# EAGLE board STorM32 BGC v130 (EAGLE 6.5.0)
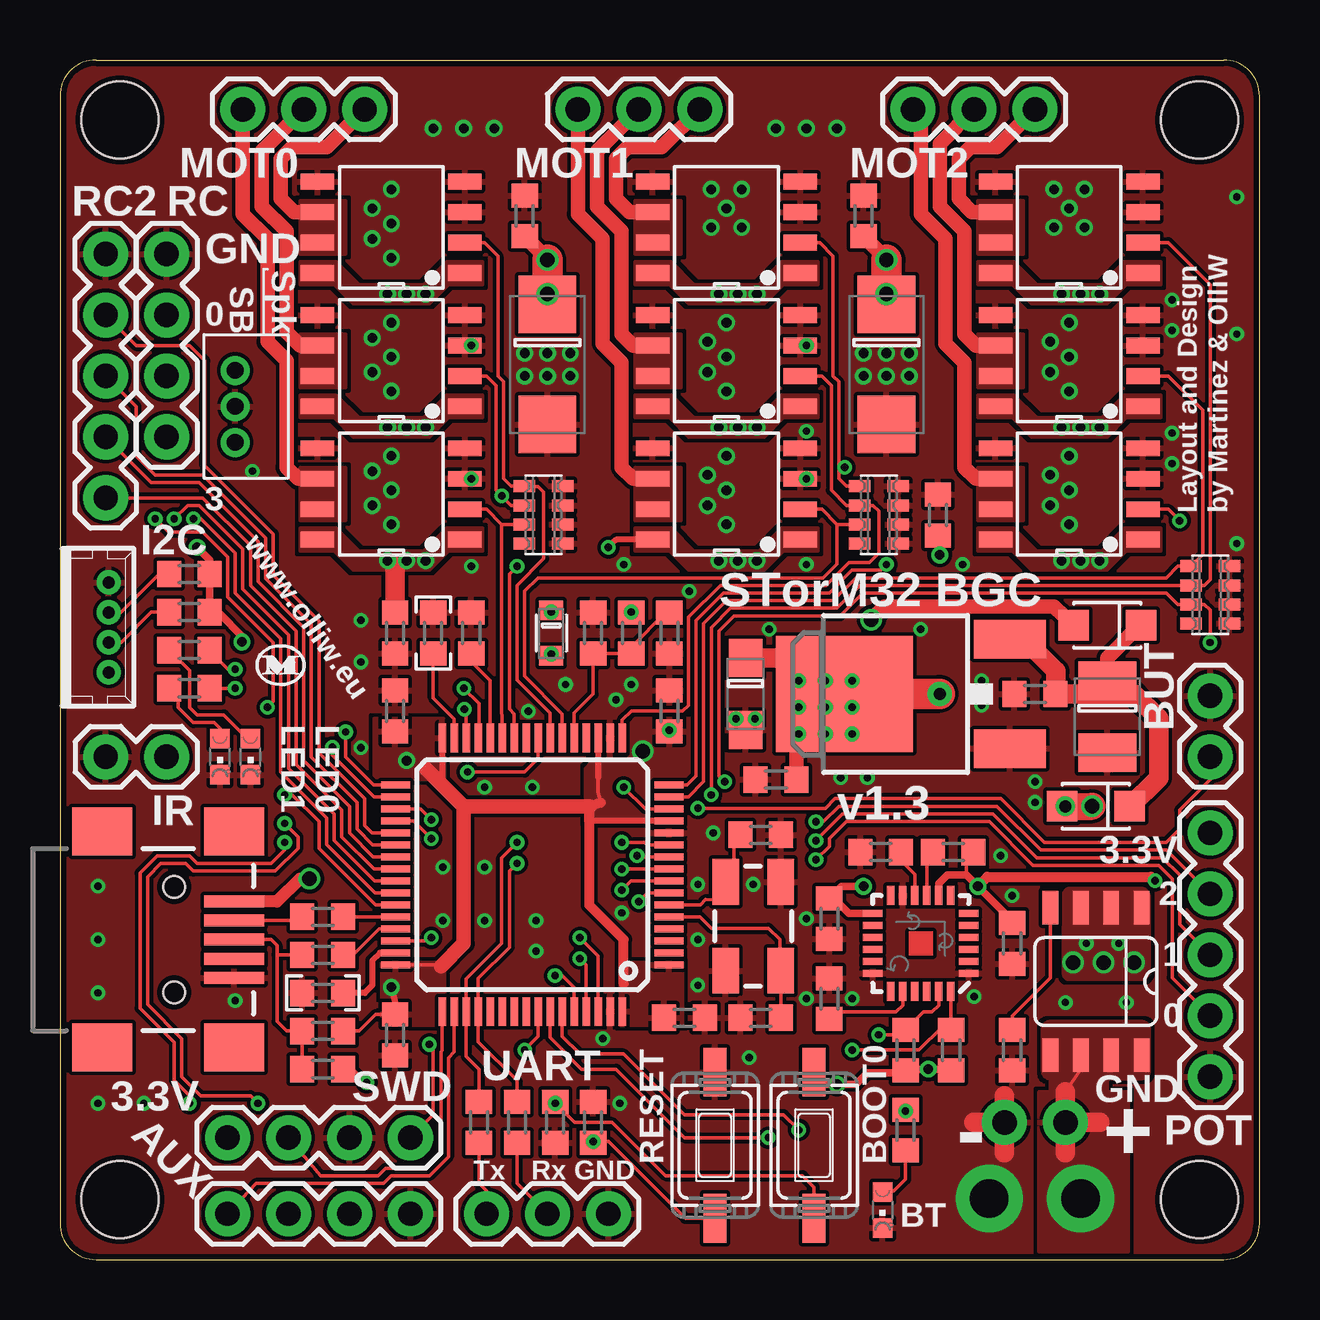
[diagram p0: board, top side]
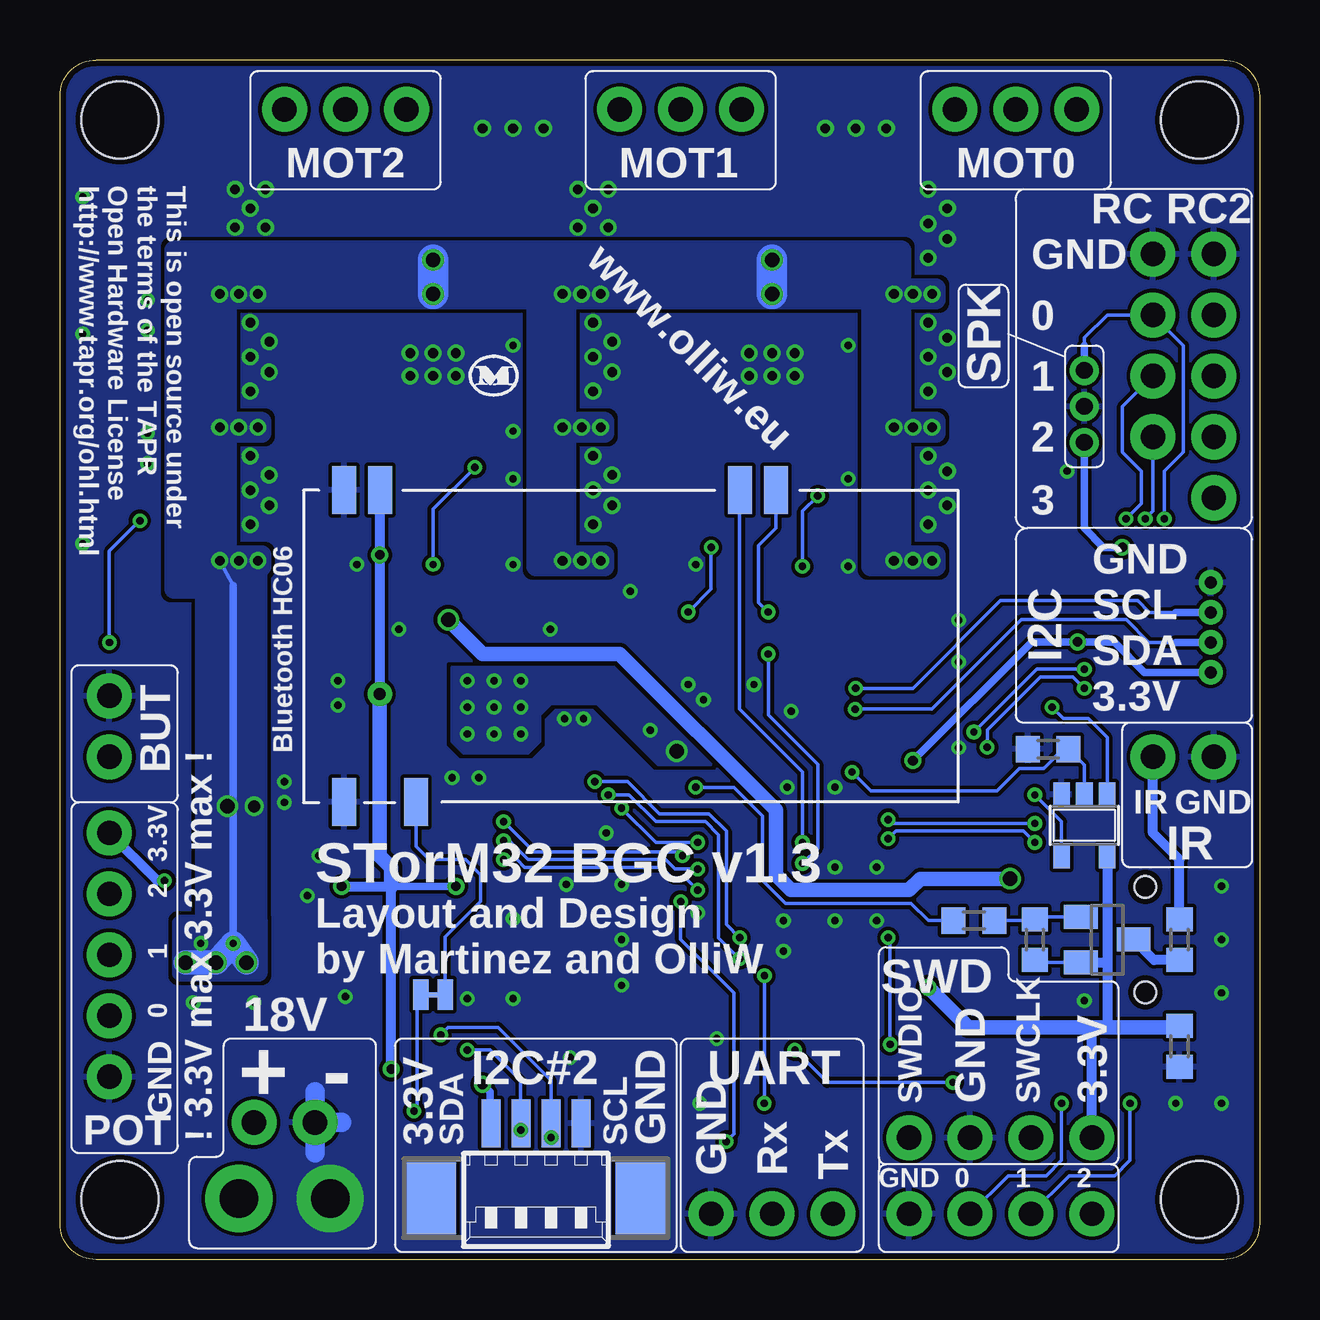
[diagram p1: board, bottom side, seen from below]

Size 50 x 50 mm. Coordinates in mm from the lower left corner, seen from the top.
Outline: 1.5,50 48.5,50 arc-90 50,48.5 50,1.5 arc-90 48.5,0 1.5,0 arc-90 0,1.5 0,48.5 arc-90 1.5,50
Copper layers (1*16): Top 0.035mm / dielectric 1.5mm / Bottom 0.035mm
Design rules "Fusion_eagle_rule_v1.1-shapes-supply-changed": minimum track width 6mil, minimum drill 12mil, track to track 6mil, track to pad 6mil, pad to pad 6mil, via to via 6mil, smd to smd 0mil, copper to edge 10mil, drill to drill 10mil, minimum pad ring 10mil, minimum via ring 6mil, stop-mask expansion 2mil, vias tented up to drill 100mil, thermal gap 6mil
Holes 3.2 mm at 2.5,2.5 2.5,47.5 47.5,2.5 47.5,47.5

## Footprints (pad centres in the part's own frame; a part is rotated, then mirrored left to right if it is on the bottom)
1X1_WITHOUT = drill 1.016 pad 1.88: 1 0,0
SMC_B = smd 1.6 x 2.4: + -1.5,0; - 1.5,0
C0603 = smd 1 x 1.1: 1 -0.85,0; 2 0.85,0
SMC_A = smd 1.6 x 1.4: + -1.5,0; - 1.5,0
SMC_C = smd 2.4 x 2.4: + -2.5,0; - 2.5,0
SOD123W-DIODE = smd 1.27 x 1.27: A -1.4,0; C 1.4,0
SOD110-R = smd 0.8 x 1: A 0.95,0; C -0.95,0
TQFP64 = smd 1.2 x 0.3: 1 -5.7,3.75; 2 -5.7,3.25; 3 -5.7,2.75; 4 -5.7,2.25; 5 -5.7,1.75; 6 -5.7,1.25; 7 -5.7,0.75; 8 -5.7,0.25; 9 -5.7,-0.25; 10 -5.7,-0.75; 11 -5.7,-1.25; 12 -5.7,-1.75; 13 -5.7,-2.25; 14 -5.7,-2.75; 15 -5.7,-3.25; 16 -5.7,-3.75; 33 5.7,-3.75; 34 5.7,-3.25; 35 5.7,-2.75; 36 5.7,-2.25; 37 5.7,-1.75; 38 5.7,-1.25; 39 5.7,-0.75; 40 5.7,-0.25; 41 5.7,0.25; 42 5.7,0.75; 43 5.7,1.25; 44 5.7,1.75; 45 5.7,2.25; 46 5.7,2.75; 47 5.7,3.25; 48 5.7,3.75 | smd 0.3 x 1.2: 17 -3.75,-5.7; 18 -3.25,-5.7; 19 -2.75,-5.7; 20 -2.25,-5.7; 21 -1.75,-5.7; 22 -1.25,-5.7; 23 -0.75,-5.7; 24 -0.25,-5.7; 25 0.25,-5.7; 26 0.75,-5.7; 27 1.25,-5.7; 28 1.75,-5.7; 29 2.25,-5.7; 30 2.75,-5.7; 31 3.25,-5.7; 32 3.75,-5.7; 49 3.75,5.7; 50 3.25,5.7; 51 2.75,5.7; 52 2.25,5.7; 53 1.75,5.7; 54 1.25,5.7; 55 0.75,5.7; 56 0.25,5.7; 57 -0.25,5.7; 58 -0.75,5.7; 59 -1.25,5.7; 60 -1.75,5.7; 61 -2.25,5.7; 62 -2.75,5.7; 63 -3.25,5.7; 64 -3.75,5.7
DPAK = smd 1.6 x 3: 1 -2.28,-5.31; 3 2.28,-5.31 | smd 4.826 x 5.715: 4 0,1.588
DFN8 = smd 0.66 x 1.397: 1 0,-3.073; 2 1.27,-3.073; 3 2.54,-3.073; 4 3.81,-3.073; 5 3.81,3.073; 6 2.54,3.073; 7 1.27,3.073; 8 0,3.073
SOT23-5 = smd 0.69 x 0.99: 1 -0.95,-1.29; 2 0,-1.29; 3 0.95,-1.29; 4 0.95,1.3; 5 -0.95,1.3
QFN-24 = smd 0.8 x 0.3: 1 -2,1.25; 2 -2,0.75; 3 -2,0.25; 4 -2,-0.25; 5 -2,-0.75; 6 -2,-1.25; 13 2,-1.25; 14 2,-0.75; 15 2,-0.25; 16 2,0.25; 17 2,0.75; 18 2,1.25 | smd 0.3 x 0.8: 7 -1.25,-2; 8 -0.75,-2; 9 -0.25,-2; 10 0.25,-2; 11 0.75,-2; 12 1.25,-2; 19 1.25,2; 20 0.75,2; 21 0.25,2; 22 -0.25,2; 23 -0.75,2; 24 -1.25,2
BT_HC05_BASIC = smd 2 x 1: 1 0,0; 2 0,-1.5; 12 0,-16.5; 13 0,-18; 22 13,-18; 24 13,-15
USB-MINIB = smd 2.5 x 0.5: D+ 2.5,0; D- 2.5,0.8; GND 2.5,-1.6; ID 2.5,-0.8; VBUS 2.5,1.6 | smd 2.5 x 2: MTN1 -3,4.5; MTN2 2.5,4.5; MTN3 -3,-4.5; MTN4 2.5,-4.5 | hole 0.9: 0,2.2; 0,-2.2
53047-04SMALL = drill 0.5 pad 0.698: 1 1.875,0.45; 2 0.625,0.45; 3 -0.625,0.45; 4 -1.875,0.45
B3B-ZR = drill 0.7 pad 1.1: 1 -1.5,0; 2 0,0; 3 1.5,0
MOLEX-53261-04-SMD-FLAT = smd 0.8 x 2: 1 1.875,-2.5; 2 0.625,-2.5; 3 -0.625,-2.5; 4 -1.875,-2.5 | smd 2.1 x 3: S1 4.375,0.625; S2 -4.375,0.625
1X04 = drill 1.016 pad 1.88: 1 0,0; 2 2.54,0; 3 5.08,0; 4 7.62,0
1X03 = drill 1.016 pad 1.88: 1 0,0; 2 2.54,0; 3 5.08,0
1X05 = drill 1.016 pad 1.88: 1 0,0; 2 2.54,0; 3 5.08,0; 4 7.62,0; 5 10.16,0
1X02 = drill 1.016 pad 1.88: 1 0,0; 2 2.54,0
CHIPLED_0603 = smd 0.8 x 0.8: A 0,-0.75; C 0,0.75
CRYTSAL-SMD-5X3 = smd 1.9 x 1.1: 1 -1.85,-1.15; 2 1.85,-1.15; 3 1.85,1.15; 4 -1.85,1.15
R0603 = smd 1 x 1.1: 1 -0.85,0; 2 0.85,0
CTS742C083 = smd 0.5 x 0.9: 1 -1.2,-0.8; 2 -0.4,-0.8; 3 0.4,-0.8; 4 1.2,-0.8; 5 1.2,0.8; 6 0.4,0.8; 7 -0.4,0.8; 8 -1.2,0.8
SJ_2S-TRACE = smd 0.635 x 1.27: 1 -0.508,0; 2 0.508,0 | smd 1.016 x 0.203: P$1 0,0
SW_TACT_3X6 = smd 2.032 x 0.965: 1 -3.048,0; 2 3.048,0
SO08 = smd 0.66 x 1.397: 1 0,-3.073; 2 1.27,-3.073; 3 2.54,-3.073; 4 3.81,-3.073; 5 3.81,3.073; 6 2.54,3.073; 7 1.27,3.073; 8 0,3.073
SOT23 = smd 1 x 1.4: 1 -0.95,-1.1; 2 0.95,-1.1; 3 0,1.1

## Placement (x,y rotation side)
BAT+  [1X1_WITHOUT]  41.91,5.71 90 top
BAT-  [1X1_WITHOUT]  39.37,5.71 0 top
C1  10u/20V  [SMC_B]  43.66,22.62 270 top
C2  100n  [C0603]  40.64,23.57 180 top
C3  100n  [C0603]  29.84,20 180 top
C4  10u/6.3V  [SMC_A]  28.57,23.57 270 top
C5  100n  [C0603]  13.97,9.37 270 top
C6  100n  [C0603]  26.04,10.08 0 top
C7  100n  [C0603]  13.97,22.86 90 top
C8  100n  [C0603]  25.4,22.86 90 top
C9  22p  [C0603]  29.21,10.08 0 top
C10  22p  [C0603]  29.21,17.7 180 top
C11  100n  [C0603]  22.23,5.71 90 top
C12  100n  [C0603]  25.4,26.11 270 top
C13  33u/20V  [SMC_C]  34.45,37.31 270 top
C14  33u/20V  [SMC_C]  20.32,37.31 270 top
C15  100n  [C0603]  33.5,43.5 90 top
C16  100n  [C0603]  19.37,43.5 90 top
C17  100n  [C0603]  13.97,26.11 270 top
C18  100n  [C0603]  3.33,8.89 270 bottom
C19  100n  [C0603]  32.07,14.21 270 top
C20  10n  [C0603]  39.69,13.18 270 top
C21  2.2n  [C0603]  32.07,10.87 90 top
C22  100n  [C0603]  34.21,16.99 180 top
C23  100n  [C0603]  36.59,31.04 90 top
D1  PMEG3010ER  [SOD123W-DIODE]  43.18,18.89 0 top
D2  PMEG3010ER  [SOD123W-DIODE]  43.66,26.43 0 top
D3  1PS76SB40  [SOD110-R]  20.48,26.11 270 top
IC1  STM32F103RCT6  [TQFP64]  19.68,16.03 180 top
IC2  NCP1117DT33G  [DPAK]  34.29,23.57 90 top
IC3  TC4452DFN08  [DFN8]  13.81,30 90 top
IC4  TC4452DFN08  [DFN8]  13.81,35.56 90 top
IC5  TC4452DFN08  [DFN8]  13.81,41.12 90 top
IC6  TC4452DFN08  [DFN8]  27.78,30 90 top
IC7  TC4452DFN08  [DFN8]  27.78,35.56 90 top
IC8  TC4452DFN08  [DFN8]  27.78,41.12 90 top
IC9  TC4452DFN08  [DFN8]  42.07,30 90 top
IC10  TC4452DFN08  [DFN8]  42.07,35.56 90 top
IC11  TC4452DFN08  [DFN8]  42.07,41.12 90 top
IC12  74AHC1G86DBV  [SOT23-5]  7.3,18.1 180 bottom
IC13  MPU6050  [QFN-24]  35.88,13.18 180 top
IC14  BT HC06  [BT_HC05_BASIC]  20.16,32.07 270 bottom
JP1  USBMINIBSMD  [USB-MINIB]  4.76,13.34 0 top
JP2  MPU-I2C#1  [53047-04SMALL]  1.59,26.35 270 top
JP3  SPK  [B3B-ZR]  7.3,35.56 90 top
JP4  I2C#2  [MOLEX-53261-04-SMD-FLAT]  30.16,3.17 180 bottom
JP5  SWD  [1X04]  14.61,5.08 180 top
JP6  UART  [1X03]  22.86,1.91 180 top
JP7  RC  [1X04]  4.45,41.91 270 top
JP8  POT  [1X05]  47.94,7.62 90 top
JP9  RC2  [1X05]  1.91,41.91 270 top
JP10  BUT  [1X02]  47.94,23.5 270 top
JP11  AUX  [1X04]  14.61,1.91 180 top
JP12  MOT0  [1X03]  7.62,47.94 0 top
JP13  MOT1  [1X03]  21.59,47.94 0 top
JP14  MOT2  [1X03]  35.56,47.94 0 top
JP15  IR  [1X02]  1.91,20.95 0 top
LED1  green  [CHIPLED_0603]  7.94,20.95 180 top
LED2  red  [CHIPLED_0603]  6.67,20.95 180 top
LED3  yellow  [CHIPLED_0603]  34.29,2.06 180 top
Q1  7B-8.000MAAJ-T  [CRYTSAL-SMD-5X3]  28.89,13.89 270 top
R1  47k  [R0603]  39.69,8.73 270 top
R2  10k  [R0603]  20.64,5.71 270 top
R3  10k  [R0603]  17.14,26.11 270 top
R4  0  [R0603]  15.56,26.11 270 top
R5  0  [R0603]  10.95,11.11 0 top
R6  1k  [R0603]  5.4,25.4 180 top
R7  2.2k  [R0603]  5.4,23.81 180 top
R8  22  [R0603]  10.95,14.29 0 top
R9  22  [R0603]  10.95,12.7 0 top
R10  150  [R0603]  10.95,7.94 0 top
R11  1.5k  [R0603]  10.95,9.53 180 top
R12  1k  [R0603]  17.46,5.71 270 top
R13  1k  [R0603]  19.05,5.71 270 top
R14  2.2k  [R0603]  5.4,28.57 0 top
R15  2.2k  [R0603]  5.4,26.99 0 top
R16  10k  [R0603]  8.81,21.27 0 bottom
R17  10k  [R0603]  23.81,26.11 270 top
R18  1.5k  [R0603]  22.23,26.11 270 top
R19  2.2k  [R0603]  11.91,14.13 0 bottom
R20  10k  [R0603]  9.37,13.34 270 bottom
R21  47  [R0603]  3.33,13.34 90 bottom
R22  10k  [R0603]  37.23,16.99 0 top
R23  2.2k  [R0603]  35.24,8.73 270 top
R24  2.2k  [R0603]  37.15,8.73 270 top
R25  2.2k  [R0603]  35.24,5.4 270 top
RN1  10k  [CTS742C083]  20.16,31.04 270 top
RN2  10k  [CTS742C083]  34.13,31.04 270 top
RN3  10k  [CTS742C083]  47.94,27.7 270 top
SJ1  [SJ_2S-TRACE]  34.45,11.03 180 bottom
SW1  [SW_TACT_3X6]  27.3,4.76 90 top
SW2  [SW_TACT_3X6]  31.43,4.76 270 top
T1  SI4835DDY  [SO08]  45.09,11.59 180 top
T2  BCX71HSMD  [SOT23]  6.35,13.34 270 bottom

## Library data of the parts
BAT+ BAT- D1 D2 IC3-IC11 JP4 Q1 T1 = # stdlib
C1-C23 R1-R25 = rcl
D3 = diode
IC1 = # stm32
IC2 IC13 JP5-JP11 JP15 SJ1 = # SparkFun2
IC12 = 74xx-little-de
IC14 = # SerialPortBluetooth
JP1 = SparkFun
JP2 = con-molex
JP3 = # jst
JP12-JP14 = # SparkFun
LED1-LED3 = led
RN1-RN3 = resistor-net; OC_FARNELL: unknown; OC_NEWARK: unknown
SW1 SW2 = # dp_devices
T2 = transistor-pnp

## Nets
3.3V: C3.1 C4.+ C5.1 C6.1 C7.1 C8.1 C18.1 C19.1 C20.1 C23.1 IC1.1 IC1.13 IC1.19 IC1.32 IC1.48 IC1.64 IC2.4 IC12.5 IC13.8 IC13.13 IC14.12 JP2.1 JP3.1 JP4.1 JP5.4 JP8.5 R11.1 R14.2 R15.2 R20.2 R22.2 R23.2 R24.2 SW2.1 T2.2
A0: IC1.27 IC3.2 RN1.3
A1: IC1.22 IC6.2 RN2.3
A2: IC1.62 IC9.2 RN3.3
AUX0: IC1.35 JP11.2
AUX1: IC1.36 JP11.3
AUX2: IC1.50 JP11.4
B0: IC1.26 IC4.2 RN1.2
B1: IC1.17 IC7.2 RN2.2
B2: IC1.15 IC10.2 RN3.1
BATP: BAT+.1 T1.5 T1.6 T1.7 T1.8
BOOT1: IC1.28 R3.2
BUT: IC1.11 JP10.2
C0: IC1.23 IC5.2 RN1.1
C1: IC1.16 IC8.2 RN2.1
C2: IC1.61 IC11.2 RN3.2
GND: BAT-.1 C1.- C2.2 C3.2 C4.- C5.2 C6.2 C7.2 C8.2 C9.1 C10.1 C11.2 C12.2 C13.- C14.- C15.2 C16.2 C17.2 C18.2 C19.2 C20.2 C21.2 C22.2 C23.2 IC1.12 IC1.18 IC1.63 IC2.1 IC3.3 IC3.4 IC3.5 IC4.3 IC4.4 IC4.5 IC5.3 IC5.4 IC5.5 IC6.3 IC6.4 IC6.5 IC7.3 IC7.4 IC7.5 IC8.3 IC8.4 IC8.5 IC9.3 IC9.4 IC9.5 IC10.3 IC10.4 IC10.5 IC11.3 IC11.4 IC11.5 IC12.3 IC13.1 IC13.11 IC13.18 IC14.13 IC14.22 JP1.GND JP2.4 JP3.2 JP4.4 JP5.2 JP6.1 JP7.1 JP8.1 JP9.1 JP10.1 JP11.1 JP15.1 LED1.C LED2.C LED3.C Q1.2 Q1.4 R1.2 R2.2 R3.1 R4.1 R5.1 R16.1 R18.1 RN1.5 RN1.6 RN1.7 RN1.8 RN2.5 RN2.6 RN2.7 RN2.8 RN3.5 RN3.6 RN3.7 RN3.8 SW1.2
IR: IC1.14 R19.1
LED0: IC1.33 R6.1
LED1: IC1.34 R7.1
LIPO: C12.1 IC1.21 R17.2 R18.2
M0A: IC3.6 IC3.7 JP12.1
M0B: IC4.6 IC4.7 JP12.2
M0C: IC5.6 IC5.7 JP12.3
M1A: IC6.6 IC6.7 JP13.1
M1B: IC7.6 IC7.7 JP13.2
M1C: IC8.6 IC8.7 JP13.3
M2A: IC9.6 IC9.7 JP14.1
M2B: IC10.6 IC10.7 JP14.2
M2C: IC11.6 IC11.7 JP14.3
N$1: R21.1 T2.3
N$2: JP15.2 R21.2
N$3: R25.1 SJ1.2
N$4: IC14.24 SJ1.1
N$5: C11.1 IC1.7 SW1.1
N$6: IC1.60 R2.1 SW2.2
N$8: LED1.A R6.2
N$9: LED2.A R7.2
N$10: IC1.47 R5.2
N$11: C9.2 IC1.5 Q1.3
N$12: C10.2 IC1.6 Q1.1
N$15: JP1.D- R8.1
N$17: JP1.D+ R9.1 R10.1 R11.2
N$19: IC13.9 R22.1
N$20: C22.1 IC13.10
N$22: LED3.A R25.2
N$23: R1.1 T1.4
N$24: C21.1 IC13.20
N$25: D3.C IC14.1
N$26: IC1.31 R4.2
N$27: R19.2 R20.1 T2.1
N$29: JP6.2 R13.2
N$32: JP6.3 R12.2
POT0: IC1.8 JP8.2
POT1: IC1.9 JP8.3
POT2: IC1.10 JP8.4
RC0-IN: IC12.1 JP3.3 JP7.2
RC0/RX: IC1.43 IC12.4
RC1/TX: IC1.42 JP7.3
RC2: IC1.41 JP7.4
RC2-0: IC1.37 JP9.2
RC2-1: IC1.38 JP9.3
RC2-2: IC1.39 JP9.4
RC2-3: IC1.40 JP9.5
RX: D3.A IC1.52 R13.1
SCL: IC1.29 JP2.3 R14.1
SCL#2: IC1.58 IC13.23 JP4.3 R23.1
SDA: IC1.30 JP2.2 R15.1
SDA#2: IC1.59 IC13.24 JP4.2 R24.1
SWCLK: IC1.49 JP5.3
SWDIO: IC1.46 JP5.1
TX: IC1.51 IC14.2 R12.1
USB-D: IC1.57 R10.2
USB-DM: IC1.44 R8.2
USB-DP: IC1.45 R9.2
VCC: C13.+ C14.+ C15.1 C16.1 C17.1 D1.A IC3.1 IC3.8 IC4.1 IC4.8 IC5.1 IC5.8 IC6.1 IC6.8 IC7.1 IC7.8 IC8.1 IC8.8 IC9.1 IC9.8 IC10.1 IC10.8 IC11.1 IC11.8 R17.1 T1.1 T1.2 T1.3
VIN: C1.+ C2.1 D1.C D2.C IC2.3
VUSB: D2.A JP1.VBUS
XOR: IC1.24 IC12.2 R16.2

## Tracks (layer width: path | path; a pad name or v marks a point on that pad's centre or on a via)
3.3V  (via drill 0.3, 0.3 pad 0.61, 0.4, 0.4 pad 0.61, 0.5 pad 1.02, 0.6)
  Top 0.152: IC1.48 15.97,12.28 15.88,12.22 | 23.55,11.57 23.5,11.51 23.42,11.51 | 22.43,20.11 22.43,19.48 22.54,19.05 | R22.2 37.94,16.83 37.79,16.68 37.78,16.03 | R23.2 35.3,7.94 | R24.2 37.25,7.94 | C23.1 36.67,29.79 | SW2.1 31.46,7.3 | R11.1 12.46,9.53 13.15,10.22 C5.1
  Top 0.254: IC1.32 15.94,20.06 | IC1.19 22.43,20.11 | IC1.13 22.04,18.28 | v13.81,11.35 14.05,10.4 | 39.84,13.98 C20.1 | 32.49,14.82 C19.1 | R15.2 6.67,26.91
  Top 0.305: IC13.13 32.88,14.43 32.49,14.82 | IC13.8 36.63,15.67 36.99,16.03 37.78,16.03 v38.26,15.56 39.84,13.98 | v33.5,15.56 32.57,15.56 C19.1 | 35.3,7.94 v36.2,7.94 37.25,7.94 | 36.67,29.79 v36.67,29.37 | R15.2 R14.2 6.25,29.15 v5.71,29.69 | 6.67,26.91 7.58,26 v7.58,25.75 | 31.46,7.3 v32.38,7.3 33.18,7.3 33.66,7.78 35.19,7.78
  Top 0.406: C5.1 14.13,10.32 | 23.5,11.51 23.5,13.34 22.07,14.76 22.07,18.89 22.54,19.05 | v38.26,15.56 38.66,15.95 45.48,15.95 v45.64,15.8 | 35.19,7.78 R23.2
  Top 0.61: 15.88,12.22 16.83,13.18 16.83,18.89 | 16.83,18.89 15.24,20.48 | 22.07,18.89 16.83,18.89 | 31.6,25.07 31.75,24.92 31.75,24.29 v31.91,24.13 | v33.02,23.02 33.02,23.26 IC2.4 | C3.1 30.7,22.68 v30.8,23.02
  Top 0.813: C4.+ 31.6,25.07
  Top 1.27: IC2.4 v36.67,23.57
  Bottom 0.152: IC14.12 36.67,32.38 | JP4.1 32.07,5.71 | T2.2 9.27,12.38 R20.2 | 6.36,12.38 6.35,12.38 | 3.55,9.68 C18.1
  Bottom 0.305: v33.5,15.56 36.2,15.56 | v14.45,20.8 9.49,25.75 v7.58,25.75 6.06,25.75 4.79,24.48 JP2.1 | 32.07,5.71 32.07,6.99 v32.38,7.3 | JP3.1 7.3,30.48 6.51,29.69 v5.71,29.69
  Bottom 0.406: v38.26,15.56 36.2,15.56 v36.2,7.94 | 36.67,32.38 v36.67,29.37 v36.67,23.57 | JP5.4 6.99,9.68 | IC12.5 6.35,12.38 6.35,9.68 | T2.2 6.36,12.38 | v45.64,15.8 45.96,15.8 JP8.5
  Bottom 0.61: v36.67,23.57 36.67,16.83 36.2,16.35 36.2,15.56 | v13.81,11.35 12.14,9.68 6.99,9.68 6.35,9.68 3.55,9.68
  other vias: 24.29,21.19 31.91,23.02 33.02,21.91 33.02,24.13 30.8,24.13 25.4,22.07 31.91,21.91 30.8,21.91
  pour Top: 25.96,9.76 23.34,9.76 23.34,12.38 25.96,12.38
  pour Top: 16.03,9.76 13.41,9.76 13.41,12.38 16.03,12.38
  pour Top: 16.03,20 13.1,20 13.1,22.54 16.03,22.54
  pour Top: 26.35,22.54 23.97,22.54 23.81,22.38 23.81,21.03 23.5,20.72 22.15,20.72 21.91,20.48 21.91,18.26 24.53,18.26 24.53,19.92 24.77,20.16 26.27,20.16 26.43,20.32 26.43,22.46
  pour Bottom: 33.66,24.69 33.66,21.59 33.18,21.11 30.48,21.11 30,21.59 30,22.7 29.53,23.18 27.62,23.18 25.08,20.64 22.86,20.64 26.91,24.69
A0
  Top 0.152: IC3.2 17.78,31.27 18.41,30.64 | 18.41,30.64 19.52,30.64 RN1.3 | 19.53,30.64 18.41,30.64 | IC1.27 18.43,22.64 18.41,22.82 18.41,30.64
A1
  Top 0.152: IC6.2 31.75,31.27 32.39,30.64 | IC1.22 20.93,22.75 19.37,24.32 19.37,27.86 19.92,28.42 31.81,28.42 32.38,28.99 32.38,30.63 32.39,30.64 | 32.39,30.64 RN2.3
A2  (via drill 0.3)
  Top 0.152: v47.94,25.72 47.94,27.07 47.7,27.3 47.07,27.3 RN3.3 46.74,27.3 46.59,27.3 46.12,27.78 33.47,27.78 32.52,26.83 28.1,26.83 27.46,26.19 27.46,20.16 v27.7,19.92 | IC9.2 46.2,31.27 v46.67,30.8 | v21.67,13.41 22.43,12.65 IC1.62
  Bottom 0.152: v47.94,25.72 47.94,29.53 v46.67,30.8 | v27.7,19.92 26.35,19.92 25,18.57 22.94,18.57 22.23,17.86 22.23,13.97 v21.67,13.41
AUX0  (via drill 0.3)
  Top 0.152: IC1.35 15.03,18.78 v15.48,18.34 | v9.37,18.18 9.92,17.62 9.92,17.14 8.97,16.19 5.56,16.19 5.24,16.51 4.21,16.51 3.65,15.95 3.65,10.64 5.08,9.21 5.08,7.62 5.87,6.83 7.94,6.83 v8.26,6.51
  Bottom 0.152: v9.37,18.18 15.32,18.18 v15.48,18.34 | JP11.2 10.48,3.49 8.89,3.49 8.26,4.13 v8.26,6.51
AUX1  (via drill 0.3)
  Top 0.152: IC1.36 14.74,18.28 v15.48,17.54 | v9.37,17.38 9.37,17.07 8.81,16.51 5.71,16.51 5.4,16.83 4.05,16.83 3.33,16.11 3.33,10.48 4.76,9.05 4.76,7.46 5.4,6.83 v5.4,6.51
  Bottom 0.152: JP11.3 7.94,3.49 6.03,3.49 5.4,4.13 v5.4,6.51 | v15.48,17.54 15.16,17.86 9.84,17.86 v9.37,17.38
AUX2
  Top 0.152: JP11.4 8.18,3.17 13.49,3.17 13.81,3.49 15.4,3.49 16.19,4.29 16.19,8.41 16.43,8.66 IC1.50
B0  (via drill 0.3 pad 0.61)
  Top 0.152: IC4.2 17.78,36.83 18.18,36.43 18.18,32.07 v18.41,31.83 18.81,31.44 RN1.2 | IC1.26 18.93,22.74 18.73,22.94 18.73,28.57 v19.05,28.89
  Bottom 0.152: v19.05,28.89 19.05,31.19 v18.41,31.83
B1
  Top 0.152: IC7.2 31.75,36.83 32.15,36.43 32.15,32.07 32.78,31.43 33.34,31.44 RN2.2 33.41,31.43 33.89,31.43 34.13,31.19 34.13,29.45 33.73,29.05 32.89,29.05 31.94,28.1 27.52,28.1 26.19,26.77 26.19,23.1 25.96,22.86 23.81,22.86 23.43,22.48 IC1.17
B2
  Top 0.152: IC10.2 46.2,36.83 47.62,35.4 47.62,29.38 RN3.1 46.6,28.9 46.12,28.42 33.18,28.42 32.23,27.46 27.78,27.46 26.83,26.51 26.83,19.92 26.19,19.29 25.87,19.29 IC1.15
BATP  (via drill 1.6 pad 2.8)
  Top 0.152: T1.6 42.55,7.94 41.91,6.99
  Top 0.813: 41.91,6.99 BAT+.1 | BAT+.1 41.91,4.45 | BAT+.1 43.34,5.71
  other vias: 42.55,2.54
  pour Top (no thermals): 41.27,9.92 45.09,9.92 arc-90 45.4,9.6 45.4,7.86 arc-90 45.09,7.54 41.27,7.54 arc-90 40.96,7.86 40.96,9.6 arc-90
  pour Top: 40.8,6.99 40.8,0.32 44.53,0.32 44.53,6.99
  pour Top: 41.27,8.26 43.66,8.26 43.66,6.91 41.27,6.91
BOOT1
  Top 0.152: IC1.28 17.93,24.13 17.14,24.92 R3.2
BUT  (via drill 0.3 pad 0.61)
  Top 0.152: JP10.2 47.94,20 46.67,18.73 46.67,17.94 46.12,17.38 41.04,17.38 39.21,19.21 32.31,19.21 31.91,18.81 v26.59,18.81 | v23.42,17.38 24.37,17.38 24.47,17.28 IC1.11
  Bottom 0.152: v23.42,17.38 25.16,17.38 v26.59,18.81
C0
  Top 0.152: IC5.2 17.7,42.39 18.26,41.83 18.26,36.83 18.49,36.59 18.49,32.54 18.8,32.24 RN1.1 19.37,32.23 19.92,32.23 20.16,31.99 20.16,29.21 19.05,28.1 19.05,24.16 20.43,22.77 IC1.23
C1  (via drill 0.3 pad 0.61)
  Top 0.152: IC8.2 31.67,42.39 32.23,41.83 32.23,36.83 32.46,36.59 32.46,33.02 | 32.46,33.02 v32.7,33.02 | v34.45,28.97 34.21,28.73 33.02,28.73 32.07,27.78 27.65,27.78 26.51,26.64 26.51,20.16 26.13,19.78 IC1.16 | 32.46,33.02 32.46,32.55 32.78,32.24 RN2.1
  Bottom 0.152: v34.45,28.97 34.45,31.27 v32.7,33.02
C2  (via drill 0.3)
  Top 0.152: IC11.2 46.2,42.39 47.94,40.64 47.94,28.34 47.71,28.1 RN3.2 47.15,28.1 46.35,28.1 33.34,28.1 32.38,27.15 27.94,27.15 27.15,26.35 v27.15,19.37 | IC1.61 21.93,12.28 v21.67,12.54
  Bottom 0.152: v21.67,12.54 22.54,13.41 22.54,17.7 23.1,18.26 25.16,18.26 26.27,19.37 v27.15,19.37
GND  (via drill 0.3, 0.4, 1.6 pad 2.8)
  Top 0.813: 39.37,6.83 BAT-.1 | BAT-.1 39.37,4.45 | BAT-.1 38.1,5.71
  Bottom 0.813: 39.37,6.99 BAT-.1 | BAT-.1 39.37,4.45 | 38.26,5.71 BAT-.1
  other vias: 13.81,39.05 13.81,37.62 13.81,36.2 26.59,11.43 26.59,13.34 26.59,15.64 15.95,16.35 3.49,6.51 8.02,32.86 19.37,36.83 20.32,36.83 21.27,36.83 19.37,37.78 20.32,37.78 21.27,37.78 33.5,37.78 34.45,37.78 33.5,36.83 34.45,36.83 35.4,37.78 35.4,36.83 23.81,23.97 7.3,10.79 33.66,20.08 32.54,20.08 35.88,26.27 28.97,22.54 38.1,10.95 28.73,8.41 39.69,15.16 17.7,19.68 12.54,24.9 31.11,10.87 40.64,19.05 1.59,13.34 49.05,29.84 49.05,38.58 49.05,44.29 1.59,15.56 1.59,11.11 1.59,6.51 12.54,26.65 15.95,14.13 19.68,19.68 19.84,12.86 17.7,16.35 23.42,14.45 23.34,6.51 41.91,10.72 44.45,10.72 23.18,23.34 38.42,24.13 38.73,2.54 31.11,14.21 27.23,17.78 33.02,10.87 13.81,44.61 13.81,41.75 13.81,43.18 13.81,33.5 13.81,30.64 13.81,32.07 27.15,44.61 28.42,43.02 27.78,39.05 27.78,37.62 27.78,36.2 27.78,33.5 27.78,32.07 41.43,44.61 27.15,43.02 41.43,43.02 42.07,39.05 42.07,37.62 42.07,36.2 42.07,33.5 42.07,32.07 27.78,30.64 42.07,30.64 42.7,43.02 42.7,44.61 28.42,44.61 17.7,14.13 19.84,14.13 13.02,43.81 13.02,42.55 13.02,38.42 13.02,36.99 13.02,32.86 13.02,31.43 26.99,38.26 26.99,36.99 26.99,32.7 26.99,31.43 41.27,38.26 41.27,36.99 41.27,32.7 41.27,31.43 27.78,43.81 42.07,43.81 12.54,21.33 28.89,15.64 22.62,9.21 19.53,22.86 28.18,22.54 23.5,28.97 17.14,28.89 37.62,28.97 40.64,19.92 15.56,47.15 16.83,47.15 18.1,47.15 31.11,47.15 29.84,47.15 32.38,47.15 21.07,23.97 31.11,32.54 17.14,32.54 17.14,38.1 31.11,38.1 46.35,38.73 46.35,33.18 31.11,34.53 46.35,34.45 46.35,40.01 38.42,23.1 26.23,27.86 31.11,28.97 29.57,26.27 39.21,16.83
  pour Top (isolate 0.152, rank 6): 0,0 0,50 50,50 50,0
  pour Bottom (isolate 0.152, rank 6): 0,0 0,50 50,50 50,0
IR  (via drill 0.3 pad 0.61)
  Top 0.152: IC1.14 24.4,18.78 v23.5,19.68
  Bottom 0.152: v23.5,19.68 21.91,19.68 20.72,18.49 20.72,15.8 19.76,14.84 14.53,14.84 13.81,14.13 R19.1
LED0  (via drill 0.3)
  Top 0.152: IC1.33 13.08,19.78 11.91,20.95 v11.91,21.99 | v7.3,24.61 6.99,24.61 6.67,24.92 6.67,24.98 R6.1
  Bottom 0.152: v7.3,24.61 9.29,24.61 v11.91,21.99
LED1  (via drill 0.3)
  Top 0.152: IC1.34 13.1,19.28 11.35,21.03 v11.35,21.35 | v7.3,23.81 R7.1
  Bottom 0.152: v11.35,21.35 11.35,22.07 9.13,24.29 7.78,24.29 v7.3,23.81
LIPO
  Top 0.152: IC1.21 21.43,22.78 22.23,23.57 R18.2 | 22.23,24.61 R18.2 | R18.2 R17.2 23.81,25.54 25.24,26.96 C12.1
M0A
  Top 0.61: JP12.1 7.62,43.58 8.65,42.55 8.65,38.26 9.45,37.47 9.45,33.02 9.92,32.54 IC3.6
  pour Top (no thermals): 11.91,30.8 10,30.8 10,33.02 11.91,33.02
M0B
  Top 0.61: JP12.2 8.41,46.2 8.41,43.89 9.45,42.86 9.45,38.66 10,38.1 IC4.6
  pour Top (no thermals): 11.91,36.35 10,36.35 10,38.58 11.91,38.58
M0C
  Top 0.61: JP12.3 11.11,46.35 9.68,46.35 9.21,45.88 9.21,44.21 9.76,43.66 IC5.6
  pour Top (no thermals): 11.91,41.91 10,41.91 10,44.13 11.91,44.13
M1A
  Top 0.61: JP13.1 21.59,43.58 22.62,42.55 22.62,38.18 23.42,37.39 23.42,33.02 23.89,32.54 IC6.6
  pour Top (no thermals): 25.88,30.8 23.97,30.8 23.97,33.02 25.88,33.02
M1B
  Top 0.61: JP13.2 22.38,46.2 22.38,43.89 23.42,42.86 23.42,38.58 23.89,38.1 IC7.6
  pour Top (no thermals): 25.88,36.35 23.97,36.35 23.97,38.58 25.88,38.58
M1C
  Top 0.61: IC8.6 23.73,43.66 23.18,44.21 23.18,45.88 23.65,46.35 25.08,46.35 JP13.3
  pour Top (no thermals): 25.88,41.91 23.97,41.91 23.97,44.13 25.88,44.13
M2A
  Top 0.61: JP14.1 35.88,47.62 35.88,43.58 36.91,42.55 36.91,38.18 37.7,37.39 37.7,33.02 38.18,32.54 IC9.6
  pour Top (no thermals): 40.16,30.8 38.26,30.8 38.26,33.02 40.16,33.02
M2B
  Top 0.61: JP14.2 36.67,46.51 36.67,43.89 37.7,42.86 37.7,38.58 38.18,38.1 IC10.6
  pour Top (no thermals): 40.16,36.35 38.26,36.35 38.26,38.58 40.16,38.58
M2C
  Top 0.61: IC11.6 38.02,43.66 37.47,44.21 37.47,45.88 37.94,46.35 39.05,46.35 JP14.3
  pour Top (no thermals): 40.16,41.91 38.26,41.91 38.26,44.13 40.16,44.13
N$1
  Bottom 0.406: R21.1 4.4,12.48 T2.3
N$2
  Bottom 0.406: R21.2 3.33,16.67 4.45,17.78 JP15.2
N$3  (via drill 0.3 pad 0.61)
  Top 0.152: 35.19,6.09 R25.1 v35.24,6.19
  Bottom 0.152: v35.24,6.19 35.12,6.32 35.12,10.79 SJ1.2
N$4
  Bottom 0.152: IC14.24 35.16,17.22 34.61,16.67 33.1,16.67 32.46,16.03 32.46,14.92 33.94,13.45 SJ1.1
N$5  (via drill 0.3)
  Top 0.152: C11.1 v22.23,4.92 22.86,4.92 26.07,1.71 SW1.1 | IC1.7 24.49,15.28 v24.13,14.92
  Bottom 0.152: v24.13,14.92 24.13,13.34 21.91,11.11 21.91,5.24 v22.23,4.92
N$6  (via drill 0.3)
  Top 0.152: R2.1 20.32,6.51 v20.64,6.51 21.44,5.71 23.02,5.71 25.24,3.49 30.96,3.49 31.43,3.02 SW2.2 | IC1.60 21.43,11.35 20.95,11.83 v20.64,11.83
  Bottom 0.152: v20.64,11.83 20.64,6.82 v20.64,6.51
N$8
  Top 0.152: R6.2 5.4,24.55 5.4,23.02 5.71,22.7 6.83,22.7 7.78,21.75 LED1.A
N$9
  Top 0.152: LED2.A 6.67,22.15 6.43,22.38 5.56,22.38 4.92,23.02 4.92,23.44 R7.2
N$10
  Top 0.254: IC1.47 13.34,12.78 13.02,12.46 13.02,11.43 12.7,11.11 R5.2
N$11
  Top 0.152: C9.2 30.04,10.46 Q1.3 30,12.08 30,13.34 29.53,13.81 27.15,13.81 26.67,14.28 IC1.5
N$12
  Top 0.152: 27.77,15.54 Q1.1 | IC1.6 26.69,14.78 26.91,15 27.7,14.99 Q1.1 | Q1.1 27.74,16.15 28.1,16.51 28.1,17.44 C10.2
N$15
  Top 0.152: R8.1 9.99,14.13 9.68,14.13 7.27,14.13 JP1.D-
N$17
  Top 0.152: JP1.D+ 8.81,13.34 9.05,13.1 9.05,12.7 | 9.05,12.7 9.05,9.92 9.45,9.53 R11.2 R10.1 | R9.1 9.05,12.7
N$19
  Top 0.152: IC13.9 36.13,16.61 R22.1
N$20
  Top 0.152: IC13.10 35.63,16.05 35.08,16.59 C22.1
N$22
  Top 0.152: R25.2 35.24,3.33 34.77,2.86 34.02,2.86 LED3.A
N$23
  Top 0.152: R1.1 39.69,10.16 41.27,11.75 T1.4
N$24
  Top 0.152: IC13.20 35.13,10.6 34.85,10.32 32.47,10.32 32.1,9.95 C21.1
N$25  (via drill 0.3 pad 0.61)
  Top 0.152: D3.C v20.48,26.99
  Bottom 0.152: IC14.1 20.16,30.48 20.88,29.77 20.88,27.38 v20.48,26.99
N$26
  Top 0.152: IC1.31 16.43,22.54 15.56,23.42 R4.2
N$27
  Bottom 0.152: R19.2 9.42,14.13 R20.1 9.27,14.29 T2.1
N$29
  Top 0.152: R13.2 19.05,3.17 JP6.2
N$32
  Top 0.152: JP6.3 17.78,2.86 17.46,3.17 R12.2
POT0  (via drill 0.3)
  Top 0.152: JP8.2 46.35,11.75 46.35,15.88 45.8,16.43 40.56,16.43 38.73,18.26 32.78,18.26 32.07,17.54 32.07,17.22 v31.51,16.67 | IC1.8 23.8,15.78 v23.42,15.4
  Bottom 0.152: v23.42,15.4 23.89,15.88 24.45,15.88 24.92,16.35 30.64,16.35 30.96,16.67 v31.51,16.67
POT1  (via drill 0.3)
  Top 0.152: v31.51,17.46 32.62,18.57 38.89,18.57 40.72,16.75 45.96,16.75 46.67,16.03 46.67,13.97 JP8.3 | IC1.9 23.43,16.28 v23.42,16.27
  Bottom 0.152: v31.51,17.46 31.27,17.46 30.48,16.67 24.77,16.67 24.37,16.27 v23.42,16.27
POT2  (via drill 0.3)
  Top 0.152: JP8.4 46.12,17.07 40.88,17.07 39.05,18.89 32.46,18.89 31.83,18.26 v31.51,18.26 | IC1.10 24.09,16.78 v24.05,16.83
  Bottom 0.152: v31.51,18.26 30.24,16.99 24.21,16.99 v24.05,16.83
RC0-IN  (via drill 0.3 pad 0.61)
  Top 0.152: v3.97,30.88 4.52,30.32 5.95,30.32 6.99,29.29 6.99,27.62 8.89,25.72 8.89,23.26 v8.65,23.02
  Bottom 0.152: v3.97,30.88 3.97,32.86 3.17,33.66 3.17,38.1 JP7.2 6.35,39.37 7.3,38.42 7.3,38.1 | IC12.1 6.35,21.75 7.14,22.54 8.18,22.54 v8.65,23.02
  Bottom 0.305: 7.3,38.1 JP3.3
RC0/RX  (via drill 0.3 pad 0.61)
  Top 0.152: IC1.43 13.16,14.78 10.79,17.14 10.79,18.26 9.68,19.37 v9.37,19.37
  Bottom 0.152: IC12.4 8.25,18.25 v9.37,19.37
RC1/TX  (via drill 0.3 pad 0.61)
  Top 0.152: IC1.42 13.13,15.28 11.11,17.3 11.11,18.41 9.21,20.32 9.21,25.88 7.3,27.78 7.3,29.45 5.87,30.88 v5.56,30.88
  Bottom 0.152: JP7.3 5.71,35.56 5.71,33.66 4.92,32.86 4.92,31.51 v5.56,30.88
RC2  (via drill 0.3 pad 0.61)
  Top 0.152: IC1.41 13.11,15.78 11.43,17.46 11.43,18.57 9.53,20.48 9.53,26.04 7.62,27.94 7.62,29.61 5.79,31.43 5.32,31.43 v4.76,30.88
  Bottom 0.152: JP7.4 4.45,31.19 v4.76,30.88
RC2-0
  Top 0.152: IC1.37 13.01,17.78 12.7,18.1 12.7,19.21 10.79,21.11 10.79,26.62 8.89,28.52 8.89,30.24 6.03,33.1 6.03,37.47 5.4,38.1 3.17,38.1 JP9.2
RC2-1
  Top 0.152: IC1.38 13.04,17.28 12.38,17.94 12.38,19.05 10.48,20.95 10.48,26.48 8.57,28.39 8.57,30.08 5.95,32.7 3.97,32.7 3.17,33.5 3.17,35.56 JP9.3
RC2-2
  Top 0.152: IC1.39 13.06,16.78 12.06,17.78 12.06,18.89 10.16,20.8 10.16,26.35 8.26,28.26 8.26,29.92 5.79,32.38 3.81,32.38 JP9.4
RC2-3
  Top 0.152: IC1.40 13.09,16.28 11.75,17.62 11.75,18.73 9.84,20.64 9.84,26.19 7.94,28.1 7.94,29.77 5.95,31.75 JP9.5
RX  (via drill 0.3, 0.3 pad 0.61)
  Top 0.152: R13.1 19.05,7.46 17.43,9.08 IC1.52 17.43,11.72 18.73,13.02 18.73,16.19 v19.05,16.51 | D3.A v20.48,25.24
  Bottom 0.152: v19.05,16.51 18.41,17.14 18.41,20.64 20.48,22.7 v20.48,25.24
SCL  (via drill 0.3)
  Top 0.152: IC1.29 17.46,21.92 17.46,23.18 v16.83,23.81 | JP2.3 2.53,26.98 4.13,28.57 R14.1
  Bottom 0.152: 3.49,26.98 4.59,26.98 5.08,27.46 10.79,27.46 14.45,23.81 v16.83,23.81
  Bottom 0.305: JP2.3 3.49,26.98
SCL#2  (via drill 0.3 pad 0.61)
  Top 0.152: IC1.58 20.43,9.25 21.75,7.94 23.18,7.94 26.04,5.08 v29.53,5.08 | IC13.23 36.63,10.59 36.35,10.32 35.98,10.32 R23.1 35.03,9.37 v34.13,9.37
  Bottom 0.152: 29.53,5.68 JP4.3 | JP4.3 29.53,5.84 v29.53,5.08 | v34.13,9.37 33.81,9.68 31.75,9.68 29.54,7.47 JP4.3
SDA  (via drill 0.3)
  Top 0.152: IC1.30 16.93,22.86 v16.86,22.94 | JP2.2 2.55,25.73 3.81,26.99 R15.1
  Bottom 0.152: 3.49,25.73 4.61,25.73 5.56,26.67 9.92,26.67 13.65,22.94 v16.86,22.94
  Bottom 0.305: JP2.2 3.49,25.73
SDA#2  (via drill 0.3 pad 0.61)
  Top 0.152: IC13.24 37.13,9.91 R24.1 36.75,9.68 35.8,8.73 v33.02,8.73 | IC1.59 20.93,9.31 21.67,8.57 23.5,8.57 26.04,6.03 30.16,6.03 v30.8,5.4
  Bottom 0.152: JP4.2 30.8,5.68 v30.8,5.4 30.8,7.46 32.07,8.73 v33.02,8.73
SWCLK
  Top 0.152: JP5.3 10.87,3.49 13.26,3.49 13.57,3.81 15.24,3.81 15.88,4.45 15.88,8.65 15.94,8.71 IC1.49
SWDIO  (via drill 0.3 pad 0.61)
  Top 0.152: IC1.46 15.35,13.28 v15.48,13.41 | v15.4,8.97 15.56,8.81 15.56,6.03 JP5.1
  Bottom 0.152: v15.48,13.41 15.4,13.34 v15.4,8.97
TX  (via drill 0.3)
  Top 0.152: v19.05,17.38 18.41,16.75 18.41,13.18 16.93,11.7 IC1.51 16.93,8.46 17.46,7.94 R12.1
  Bottom 0.152: IC14.2 21.67,32.39 21.67,22.94 19.05,20.32 v19.05,17.38
USB-D  (via drill 0.3)
  Top 0.152: IC1.57 19.93,9.3 v19.37,8.73 | v12.78,7.38 12.22,7.94 R10.2
  Bottom 0.152: v12.78,7.38 18.02,7.38 v19.37,8.73
USB-DM
  Top 0.152: IC1.44 R8.2
USB-DP
  Top 0.152: IC1.45 13.31,13.78 12.22,12.7 R9.2
VCC  (via drill 0.3, 0.3 pad 0.61, 0.4, 0.5, 0.6, 0.6 pad 0.61)
  Top 0.152: v23.81,26.99 R17.1 | 13.97,28.89 14.45,28.89 v14.45,29.13 | 20.32,41.7 v20.32,41.67 | 34.45,41.7 v34.45,41.67
  Top 0.254: IC6.8 23.18,30 v22.86,29.69
  Top 0.61: C16.1 20.32,41.7 | C15.1 34.45,41.7
  Top 0.813: C17.1 13.97,28.89
  Top 1.118: D1.A v41.91,18.89 v43.02,18.89
  Top 1.27: C14.+ v20.32,41.67 | C13.+ v34.45,40.24 v34.45,41.67
  Bottom 0.152: v23.81,26.99 22.86,27.94 v22.86,29.69 | 42.78,28.1 v43.34,29.13
  Bottom 0.305: v42.78,13.18 42.78,18.81 42.78,28.1
  Bottom 0.406: 15.08,40.32 v15.24,40.24 | v43.02,18.89 42.78,18.89 42.78,18.81
  Bottom 1.016: v42.23,12.38 v42.78,13.18 v43.5,12.38 v44.77,12.38
  Bottom 1.27: v20.32,41.67 v20.32,40.24 | v34.45,41.67 v34.45,40.24
  other vias: 14.45,34.69 15.24,34.69 15.24,29.13 44.13,13.18 14.45,40.24 13.65,40.24 13.65,34.69 13.65,29.13 28.26,40.24 27.46,40.24 29.05,34.69 28.26,34.69 27.46,34.69 29.05,29.13 28.26,29.13 27.46,29.13 42.55,40.24 41.75,40.24 43.34,34.69 42.55,34.69 41.75,34.69 42.55,29.13 41.75,29.13 29.05,40.24 43.34,40.24
  pour Bottom (rank 4): 14.92,42.07 45.24,42.07 45.24,40.01 14.92,40.01
  pour Top (no thermals): 45.07,15.48 42.08,15.48 arc90 41.83,15.14 41.83,11.92 arc90 42.08,11.67 45.07,11.67 arc90 45.4,12.08 45.4,15.07 arc90
  pour Bottom: 41.43,14.13 arc-90 41.75,14.29 44.93,14.29 arc-90 45.24,13.97 45.24,11.99 arc-90 44.93,11.67 41.75,11.67 arc-90 41.43,11.99
  pour Bottom: 14.92,41.12 14.92,28.89 16.19,28.89 16.19,41.12
  pour Bottom: 15.4,40.48 13.49,40.48 13.49,40.01 15.4,40.01
  pour Bottom: 15.56,34.92 13.49,34.92 13.49,34.45 15.56,34.45
  pour Bottom: 15.56,29.37 13.49,29.37 13.49,28.89 15.56,28.89
  pour Bottom: 28.89,41.12 28.89,28.89 30.16,28.89 30.16,41.12
  pour Bottom: 29.37,29.37 27.3,29.37 27.3,28.89 29.37,28.89
  pour Bottom: 29.37,34.92 27.3,34.92 27.3,34.45 29.37,34.45
  pour Bottom: 43.97,34.92 41.59,34.92 41.59,34.45 43.97,34.45
  pour Bottom: 43.97,29.37 41.59,29.37 41.59,28.89 43.97,28.89
  pour Bottom: 41.75,28.89 41.75,12.06 43.97,12.06 43.97,28.89
  pour Bottom: 43.02,40.96 43.02,27.94 45.24,27.94 45.24,40.96
  pour Top (no thermals): 38.26,41.59 39.77,41.59 40.72,40.64 43.42,40.64 44.37,41.59 45.88,41.59 45.88,40.64 44.45,40.64 43.66,39.85 40.48,39.85 39.69,40.64 38.26,40.64
  pour Top (no thermals): 38.26,36.04 39.77,36.04 40.72,35.08 43.42,35.08 44.37,36.04 45.88,36.04 45.88,35.08 44.45,35.08 43.66,34.29 40.48,34.29 39.69,35.08 38.26,35.08
  pour Top (no thermals): 38.26,30.48 39.77,30.48 40.72,29.53 43.42,29.53 44.37,30.48 45.88,30.48 45.88,29.53 44.45,29.53 43.66,28.73 40.48,28.73 39.69,29.53 38.26,29.53
  pour Top (no thermals): 23.97,41.59 25.48,41.59 26.43,40.64 29.13,40.64 30.08,41.59 31.59,41.59 31.59,40.64 30.16,40.64 29.37,39.85 26.19,39.85 25.4,40.64 23.97,40.64
  pour Top (no thermals): 23.97,36.04 25.48,36.04 26.43,35.08 29.13,35.08 30.08,36.04 31.59,36.04 31.59,35.08 30.16,35.08 29.37,34.29 26.19,34.29 25.4,35.08 23.97,35.08
  pour Top (no thermals): 23.97,30.48 25.48,30.48 26.43,29.53 29.13,29.53 30.08,30.48 31.59,30.48 31.59,29.53 30.16,29.53 29.37,28.73 26.19,28.73 25.4,29.53 23.97,29.53
  pour Top (no thermals): 10,41.59 11.51,41.59 12.46,40.64 15.16,40.64 16.11,41.59 17.62,41.59 17.62,40.64 16.19,40.64 15.4,39.85 12.22,39.85 11.43,40.64 10,40.64
  pour Top (no thermals): 10,36.04 11.51,36.04 12.46,35.08 15.16,35.08 16.11,36.04 17.62,36.04 17.62,35.08 16.19,35.08 15.4,34.29 12.22,34.29 11.43,35.08 10,35.08
  pour Top (no thermals): 10,30.48 11.51,30.48 12.46,29.53 15.16,29.53 16.11,30.48 17.62,30.48 17.62,29.53 16.19,29.53 15.4,28.73 12.22,28.73 11.43,29.53 10,29.53
VIN
  Top 0.152: C1.+ 43.66,23.57
  Top 0.406: 40.5,25.54 IC2.3
  Top 0.61: D1.C 44.58,18.86 | D2.C 44.85,26.27 43.66,25.08 C1.+ | IC2.3 40.34,25.85 | 41.51,23.52 C2.1
  Top 0.813: 44.58,18.86 45.8,20.08 45.8,22.54 44.77,23.57 43.66,23.57 C2.1 | 41.51,23.52 41.51,24.53 40.5,25.54
VUSB  (via drill 0.6)
  Top 0.406: 7.28,14.92 JP1.VBUS
  Top 0.508: v10.4,15.88 10,15.88 9.05,14.92 7.28,14.92
  Top 0.61: v33.81,26.67 34.37,27.23 41.43,27.23 D2.A
  Bottom 0.61: v33.81,26.67 32.38,25.24 26.67,25.24 20.16,18.73 20.16,16.03 19.53,15.4 14.61,15.4 14.13,15.88 v10.4,15.88
XOR  (via drill 0.3 pad 0.61)
  Top 0.152: IC1.24 19.93,20.89 19.37,20.32 v16.99,20.32
  Bottom 0.152: v16.99,20.32 16.19,19.53 10.95,19.53 10,20.48 8.99,20.48 8.2,21.27 R16.2 7.3,20.61 IC12.2

## Text on the board
tNames: MOT0 | MOT1 | MOT2 | RC2 | RC | GND | 0 | SB | Spk | 3 | Layout and Design | by Martinez & OlliW | www.olliw.eu | I2C | STorM32 BGC | BUT | LED1 | LED0 | IR | v1.3 | 3.3V | 2 | 1 | 0 | SWD | UART | GND | 3.3V | POT | RESET | BOOT0 | - | + | Tx | Rx | GND | AUX | BT
bNames: MOT0 | MOT1 | MOT2 | This is open source under / the terms of the TAPR / Open Hardware License / http://www.tapr.org/ohl.html | RC2 | RC | GND | SPK | 0 | 1 | www.olliw.eu | 2 | 3 | GND | SCL | SDA | I2C | BUT | 3.3V | Bluetooth HC06 | GND | IR | 3.3V | IR | STorM32 BGC v1.3 | 2 | Layout and Design | 1 | by Martinez and OlliW | SWD | 0 | 18V | GND | 3.3V | SWCLK | GND | SWDIO | UART | I2C#2 | - | + | GND | SCL | SDA | 3.3V | ! 3.3V max 3.3V max ! | POT | 2 | 1 | 0 | GND | Tx | Rx | GND